# Altium PCB PCB1.PcbDoc (part 4 of 4)
Units mm, origin at the board's own origin, x right, y up, seen from the top; angles counter-clockwise.
Board outline 190.88 x 117.47 mm, 2 copper layers (Top Layer, Bottom Layer); 405 components, 307 nets, 1341 pads, 251 vias.
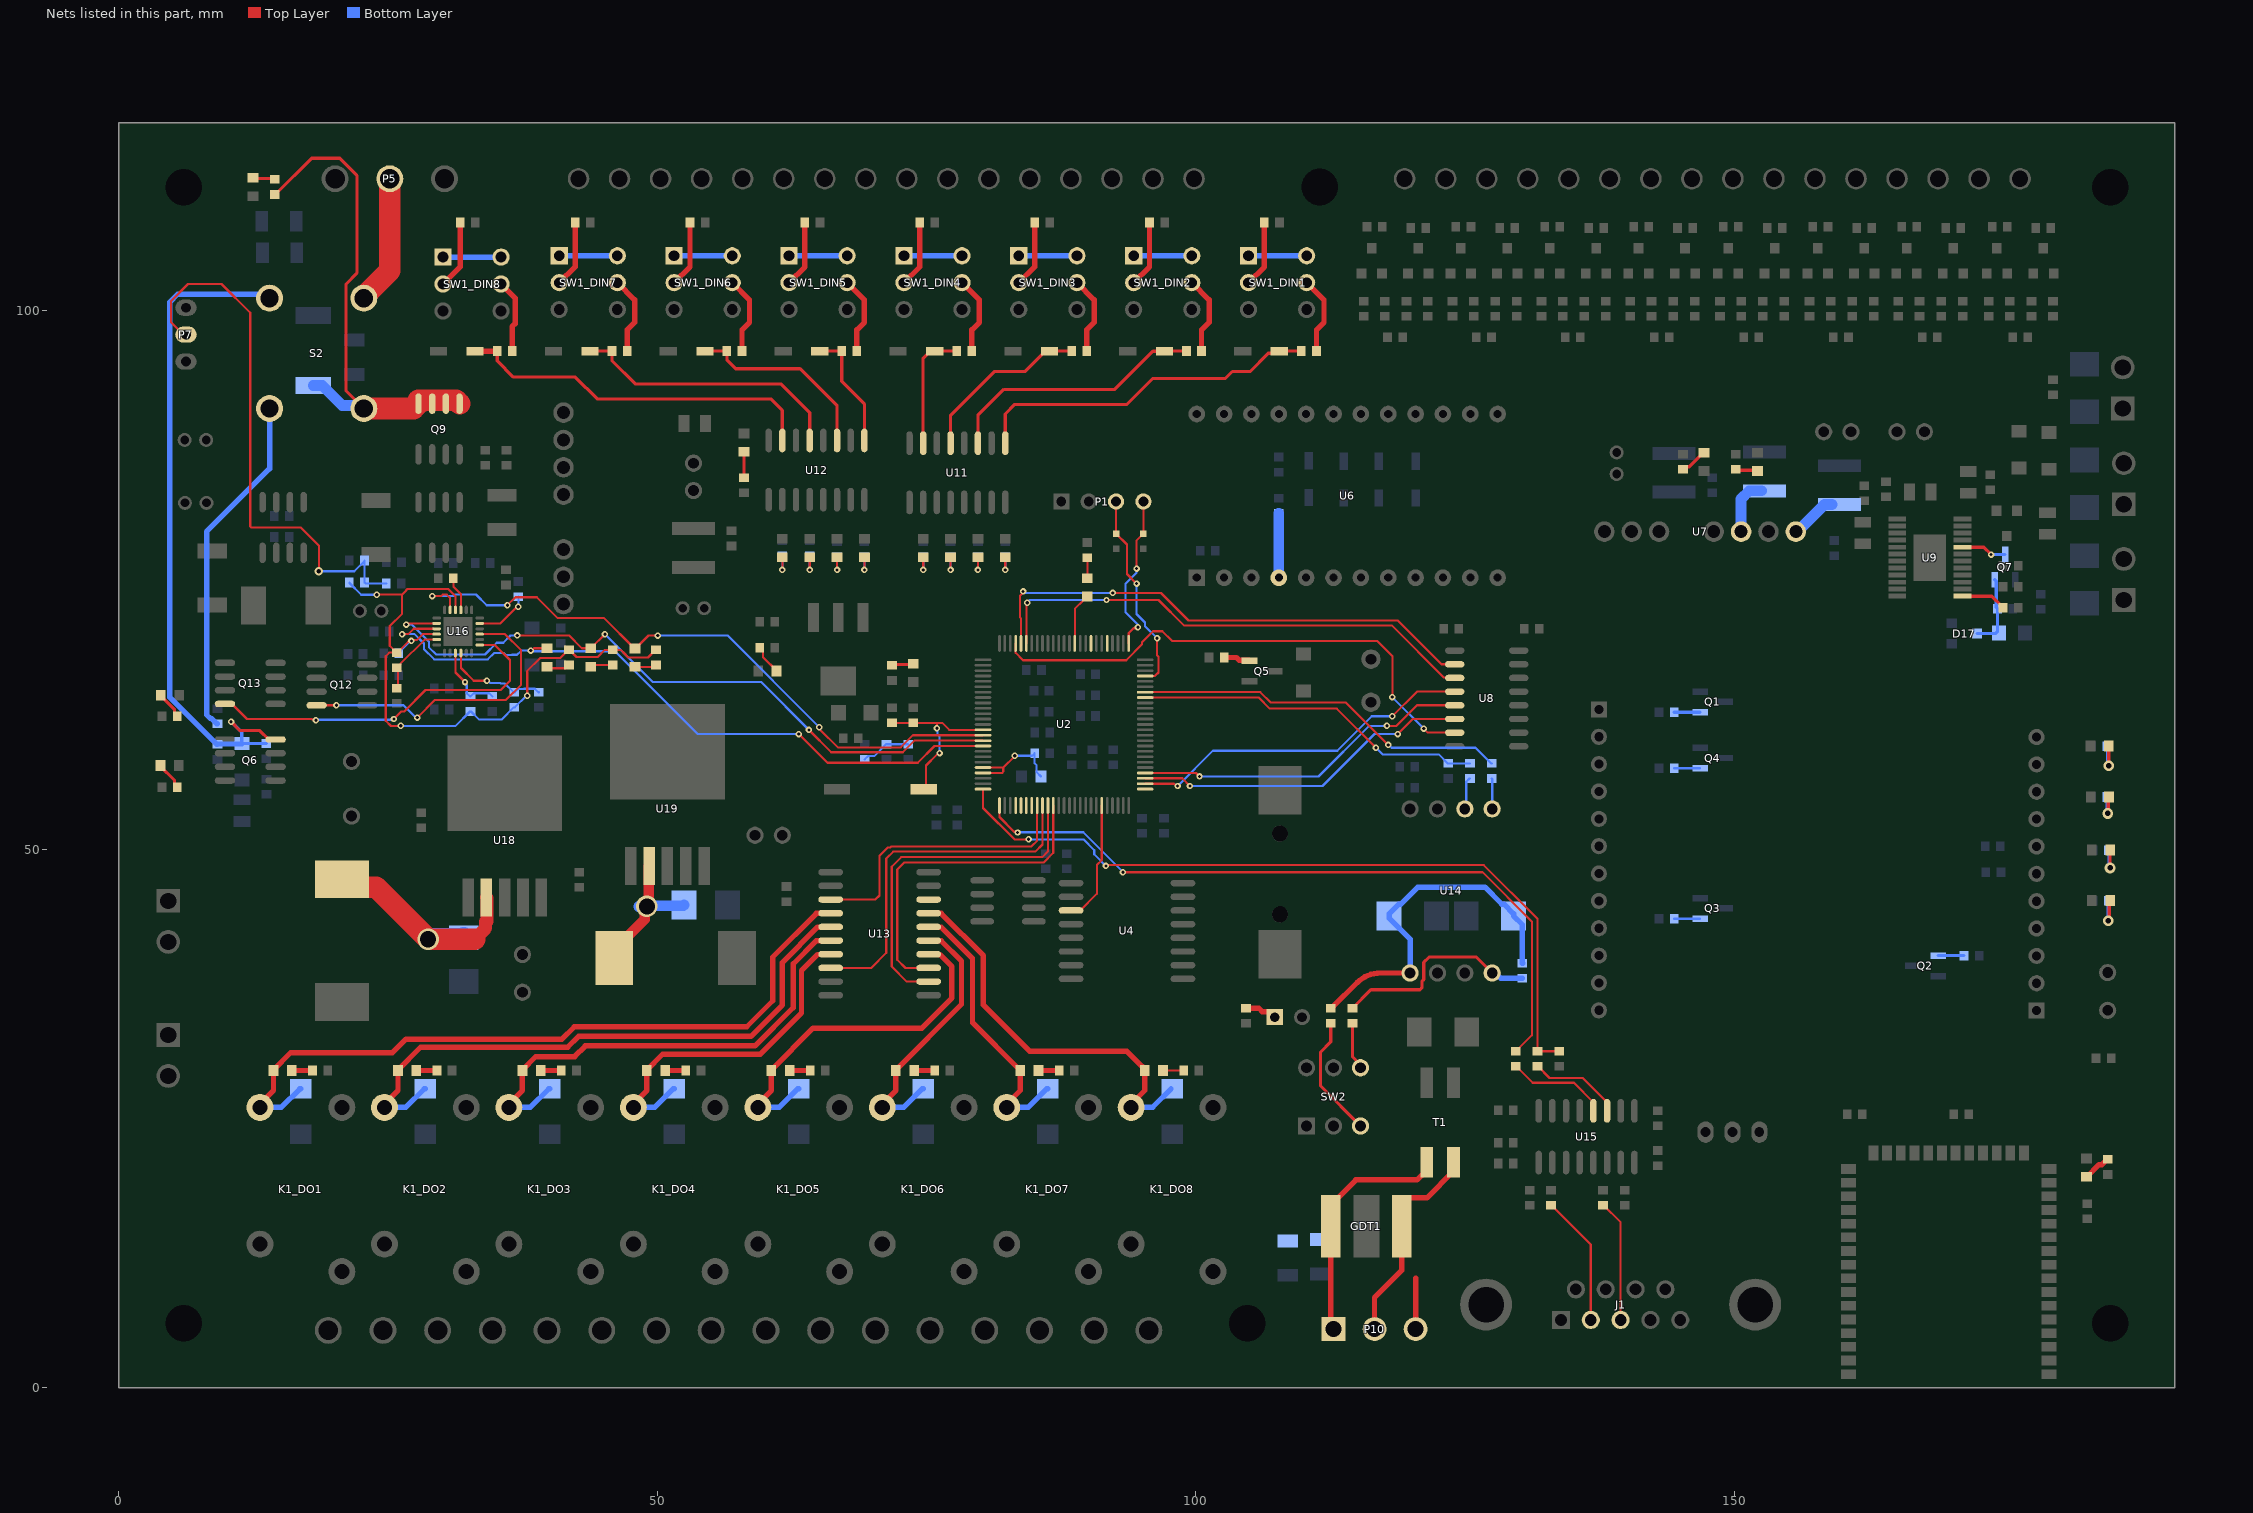
[diagram p4: the nets of this part, all layers, seen from the top]

## Via types
v1: diameter 0.6, hole 0.3, Top Layer to Bottom Layer, 163 vias
v2: diameter 0.8, hole 0.4, Top Layer to Bottom Layer, 40 vias
v3: diameter 1, hole 0.5, Top Layer to Bottom Layer, 30 vias
v4: diameter 1.27, hole 0.711, Top Layer to Bottom Layer, 11 vias
v5: diameter 1.5, hole 1, Top Layer to Bottom Layer, 4 vias
v6: diameter 2, hole 1.5, Top Layer to Bottom Layer, 2 vias
v7: diameter 2, hole 1, Top Layer to Bottom Layer, 1 vias

## Nets (pads, with @x,y where several pads share a name; then routed paths per layer and width w, separated by ;. In a path a pad name is that pad's centre, name@x,y a point inside that pad or via, vN(x,y) a via of type N, cw(c..) or ccw(c..) an arc to the next point about the centre after c; other vN are vias at no path point) (continued)
NetD17_3: D17.3 Q7.E R37.2 R38.1 | length 6.9
  Bottom Layer w0.3: D17.3@172.53,70.038 174.232,70.038 174.433,70.239 R37.2@174.433,72.335 174.308,72.46 174.308,74.9 Q7.E@174.183,75.025
NetD27_2: D27.2 L6.1 U18.2 | length 22.3
  Top Layer w1.2: 33.02,41.656 34.047,42.683 34.047,43.314 ; U18.2@34.112,45.534 34.178,45.469 34.178,43.314
  Top Layer w2: L6.1@20.701,47.229 21.451,46.479 23.879,46.479 v6(28.702,41.656) 33.02,41.656
  Bottom Layer w2: v6(28.702,41.656) 28.762,41.716 31.944,41.716 D27.2@32.004,41.776
NetD28_2: D28.2 L7.1 U19.2 | length 14
  Top Layer w1: L7.1@45.989,39.922 45.989,40.672 48.831,43.514 48.831,44.513 v6(49.022,44.704) ; v6@49.225,44.798 49.191,44.832 49.191,48.42 U19.2@49.225,48.455
  Bottom Layer w1: v6@48.253,44.704 v6(49.022,44.704) 49.085,44.767 52.394,44.767 D28.2@52.458,44.831
NetGDT1_1: GDT1.1 P10.2 T1.2 | length 19.5
  Top Layer w0.5: P10.2@116.586,5.461 116.586,8.382 119.124,10.92 119.124,16.986 119.774,17.636 121.455,17.636 123.932,20.113 T1.2@123.932,20.938
NetGDT1_3: GDT1.3 P10.1 T1.3 | length 22.7
  Top Layer w0.5: P10.1@112.776,5.461 112.524,5.713 112.524,16.986 114.842,19.304 120.523,19.304 120.982,19.763 121.082,19.763 121.432,20.113 T1.3@121.432,20.938
NetJ1_2: J1.2 R62.2 | length 12.2
  Top Layer w0.2: R62.2@132.969,16.953 133.019,16.953 136.664,13.308 J1.2@136.664,6.304
NetJ1_3: J1.3 R64.2 | length 11.4
  Top Layer w0.2: R64.2@137.795,16.953 137.845,16.953 139.434,15.364 J1.3@139.434,6.304
NetL2_2: L2.2 U7.6 | length 5.2
  Bottom Layer w1: U7.6@150.622,79.502 150.622,82.531 151.381,83.29 L2.2@152.527,83.29
NetL3_2: L3.2 U7.8 | length 4.4
  Bottom Layer w1: U7.8@155.702,79.502 155.848,79.502 158.366,82.02 L3.2@159.066,82.02
NetLED1_2: LED1.2 R1.1 | length 3.7
  Top Layer w0.3: v3(184.758,57.758) LED1.2@184.758,59.599
  Bottom Layer w0.3: R1.1@184.596,59.563 184.677,59.482 184.677,57.839 v3(184.758,57.758)
NetLED2_2: LED2.2 R6.1 | length 3.8
  Top Layer w0.3: v3(184.723,43.369) 184.804,43.45 184.804,45.168 LED2.2@184.885,45.249
  Bottom Layer w0.3: v3(184.723,43.369) R6.1@184.723,45.212
NetLED3_2: LED3.2 R7.1 | length 3.4
  Top Layer w0.3: v3(184.885,48.273) LED3.2@184.885,49.947
  Bottom Layer w0.3: R7.1@184.723,49.911 184.804,49.83 184.804,48.354 v3(184.885,48.273)
NetLED4_2: LED4.2 R8.1 | length 3.1
  Top Layer w0.3: v3(184.658,53.34) 184.721,53.404 184.721,54.8 LED4.2@184.785,54.864
  Bottom Layer w0.3: R8.1@184.596,54.864 184.596,53.402 v3(184.658,53.34)
NetLED5_1: LED5.1 U2.86 | length 4.9
  Top Layer w0.2: U2.86@88.757,69.12 88.757,72.325 89.516,73.084 89.516,73.134 89.866,73.484 LED5.1@89.916,73.484
NetLED5_2: LED5.2 R15.1 | length 1.9
  Top Layer w0.2: LED5.2@89.916,75.184 R15.1@89.916,77.089
NetLED6_2: LED6.2 R22.1 | length 2.6
  Top Layer w0.5: LED6.2@182.702,19.597 182.752,19.597 183.871,20.716 184.112,20.716 184.608,21.212 R22.1@184.658,21.212
NetLED7_2: LED7.2 R42.1 | length 2.4
  Top Layer w0.2: v1(82.296,75.946) LED7.2@82.296,77.128
  Bottom Layer w0.2: v1(82.296,75.946) R42.1@82.296,77.151
NetLED8_2: LED8.2 R43.1 | length 2.4
  Top Layer w0.2: v1(69.215,75.946) LED8.2@69.215,77.128
  Bottom Layer w0.2: v1(69.215,75.946) R43.1@69.215,77.151
NetLED9_2: LED9.2 R44.1 | length 2.4
  Top Layer w0.2: v1(79.756,75.946) LED9.2@79.756,77.128
  Bottom Layer w0.2: v1(79.756,75.946) R44.1@79.756,77.151
NetLED10_2: LED10.2 R45.1 | length 2.1
  Top Layer w0.2: v1@66.675,76.2 LED10.2@66.675,77.128
  Bottom Layer w0.2: v1(66.675,75.946) R45.1@66.675,77.151
NetLED11_2: LED11.2 R46.1 | length 2.4
  Top Layer w0.2: v1(77.216,75.946) LED11.2@77.216,77.128
  Bottom Layer w0.2: v1(77.216,75.946) R46.1@77.216,77.151
NetLED12_2: LED12.2 R47.1 | length 2.5
  Top Layer w0.2: v1(64.135,75.946) LED12.2@64.135,77.128
  Bottom Layer w0.2: v1(64.135,75.946) R47.1@64.135,77.278
NetLED13_2: LED13.2 R48.1 | length 2.4
  Top Layer w0.2: v1(74.676,75.946) LED13.2@74.676,77.128
  Bottom Layer w0.2: v1(74.676,75.946) R48.1@74.676,77.151
NetLED14_2: LED14.2 R49.1 | length 2.5
  Top Layer w0.2: v1(61.595,75.946) LED14.2@61.595,77.128
  Bottom Layer w0.2: v1(61.595,75.946) R49.1@61.595,77.278
NetLED15_DO1_2: LED15_DO1.2 R52_DO1.2 | length 1.9
  Top Layer w0.5: LED15_DO1.2@16.047,29.464 R52_DO1.2@17.969,29.464
NetLED15_DO2_2: LED15_DO2.2 R52_DO2.2 | length 1.9
  Top Layer w0.5: LED15_DO2.2@27.604,29.464 R52_DO2.2@29.526,29.464
NetLED15_DO3_2: LED15_DO3.2 R52_DO3.2 | length 1.9
  Top Layer w0.5: LED15_DO3.2@39.161,29.464 R52_DO3.2@41.083,29.464
NetLED15_DO4_2: LED15_DO4.2 R52_DO4.2 | length 1.9
  Top Layer w0.5: LED15_DO4.2@50.718,29.464 R52_DO4.2@52.64,29.464
NetLED15_DO5_2: LED15_DO5.2 R52_DO5.2 | length 1.9
  Top Layer w0.5: LED15_DO5.2@62.275,29.464 R52_DO5.2@64.197,29.464
NetLED15_DO6_2: LED15_DO6.2 R52_DO6.2 | length 1.9
  Top Layer w0.5: LED15_DO6.2@73.832,29.464 R52_DO6.2@75.754,29.464
NetLED15_DO7_2: LED15_DO7.2 R52_DO7.2 | length 1.9
  Top Layer w0.5: LED15_DO7.2@85.389,29.464 R52_DO7.2@87.311,29.464
NetLED15_DO8_2: LED15_DO8.2 R52_DO8.2 | length 1.9
  Top Layer w0.2: LED15_DO8.2@96.946,29.464 R52_DO8.2@98.868,29.464
NetLED16_2: LED16.2 R77.2 | length 2
  Top Layer w0.2: LED16.2@47.916,66.946 49.701,66.946 R77.2@49.872,67.118
NetLED17_2: LED17.2 R78.2 | length 2.2
  Top Layer w0.2: LED17.2@39.751,66.968 39.9,66.819 41.484,66.819 R78.2@41.783,67.118
NetLED18_2: LED18.2 R81.2 | length 2.1
  Top Layer w0.2: LED18.2@43.815,66.968 43.965,67.118 R81.2@45.847,67.118
NetLED19_2: LED19.2 R29.1 | length 2.6
  Top Layer w0.3: R29.1@145.217,85.279 145.467,85.529 145.824,85.529 147.124,86.829 LED19.2@147.174,86.829
NetLED20_1: LED20.1 R30.1 | length 2.1
  Top Layer w0.3: R30.1@150.114,85.279 150.189,85.204 152.071,85.204 LED20.1@152.146,85.129
NetLED21_2: LED21.2 R41.1 | length 2.4
  Top Layer w0.3: R41.1@58.039,84.52 LED21.2@58.039,86.907
NetLED22_2: LED22.2 R28.1 | length 2.8
  Top Layer w0.2: R28.1@59.498,68.707 59.798,68.407 59.798,67.848 61.048,66.598 LED22.2@61.048,66.548
NetLED23_2: LED23.2 R40.1 | length 2
  Top Layer w0.3: R40.1@71.787,67.082 71.862,67.157 73.674,67.157 LED23.2@73.749,67.232
NetLED24_2: LED24.2 R88.1 | length 2.7
  Top Layer w0.3: LED24.2@3.849,57.785 3.849,57.735 5.149,56.435 5.149,56.003 R88.1@5.399,55.753
NetLED25_2: LED25.2 R89.1 | length 2.1
  Top Layer w0.3: LED25.2@12.446,112.356 12.521,112.281 14.403,112.281 R89.1@14.478,112.206
NetLED26_2: LED26.2 R5.1 | length 2.6
  Top Layer w0.3: LED26.2@3.888,64.313 3.888,64.263 5.149,63.002 5.149,62.607 R5.1@5.399,62.357
NetP2_1: P2.1 R54.1 | length 3.1
  Top Layer w0.5: R54.1@104.648,35.244 105.848,35.244 106.175,34.917 106.815,34.917 P2.1@107.315,34.417
  Bottom Layer w0.5: P2.1@107.25,34.352 P2.1@107.315,34.417
NetP7_2: P7.2 R83.2 R86.1 R87.1 | length 51.1
  Top Layer w0.2: P7.2@6.223,97.79 5.973,97.79 4.826,98.937 4.826,100.9 6.415,102.489 9.525,102.489 12.192,99.822 12.192,80 12.309,79.883 16.891,79.883 18.557,78.217 v2(18.557,75.823)
  Bottom Layer w0.2: v2(18.557,75.823) 21.859,75.823 22.798,76.761 R87.1@22.798,76.811 R83.2@22.798,74.778 22.9,74.676 R86.1@24.827,74.676
NetQ1_B: Q1.B R3.2 | length 2.4
  Bottom Layer w0.3: R3.2@144.399,62.738 Q1.B@146.812,62.738
NetQ2_B: Q2.B R9.2 | length 2.4
  Bottom Layer w0.3: Q2.B@168.91,40.132 R9.2@171.32,40.132
NetQ3_B: Q3.B R10.2 | length 2.4
  Bottom Layer w0.2: R10.2@144.399,43.561 Q3.B@146.812,43.561
NetQ4_B: Q4.B R11.2 | length 2.4
  Bottom Layer w0.2: R11.2@144.399,57.531 Q4.B@146.812,57.531
NetQ5_B: Q5.B R17.1 | length 2.5
  Top Layer w0.5: R17.1@102.618,67.818 103.768,67.818 104.038,67.548 104.926,67.548 Q5.B@104.976,67.498
NetQ7_C: Q7.C U9.20 | length 4.2
  Top Layer w0.3: U9.20@171.171,78.054 173.152,78.054 v1(173.831,77.375)
  Bottom Layer w0.3: v1(173.831,77.375) Q7.C@175.133,77.375
NetQ12_4: Q12.4 U16.21 | length 28.1
  Top Layer w0.2: Q12.4@18.351,63.373 v1(20.193,63.373) ; v1(27.686,62.23) 29.337,63.881 35.941,63.881 37.338,65.278 37.338,68.489 35.846,69.981 U16.21@33.796,69.981
  Bottom Layer w0.2: v1(20.193,63.373) 26.416,63.373 27.398,62.391 27.417,62.391 27.578,62.23 v1(27.686,62.23)
NetQ13_4: Q13.4 U16.19 | length 33.6
  Top Layer w0.2: Q13.4@9.842,63.5 10.492,63.5 11.889,62.103 17.907,62.103 17.957,62.053 18.211,62.053 v1(18.288,61.976) ; v1(25.527,62.103) 26.224,62.8 26.478,62.8 28.467,64.789 35.445,64.789 36.312,65.656 36.312,67.574 34.905,68.981 U16.19@33.796,68.981
  Bottom Layer w0.2: v1(18.288,61.976) 18.351,62.039 25.463,62.039 v1(25.527,62.103)
NetR39_1: R39.1 U9.13 | length 4.2
  Top Layer w0.3: U9.13@171.171,73.508 173.91,73.508 174.941,72.476 R39.1@174.941,72.426
NetR50_DIN1_1: R50_DIN1.1 SW1_DIN1.5 | length 7.3
  Top Layer w0.5: SW1_DIN1.5@110.285,102.616 111.887,101.014 111.887,98.933 111.19,98.236 R50_DIN1.1@111.19,96.266
NetR50_DIN2_1: R50_DIN2.1 SW1_DIN2.5 | length 7.3
  Top Layer w0.5: SW1_DIN2.5@99.617,102.616 101.219,101.014 101.219,98.933 100.522,98.236 R50_DIN2.1@100.522,96.266
NetR50_DIN3_1: R50_DIN3.1 SW1_DIN3.5 | length 7.3
  Top Layer w0.5: SW1_DIN3.5@88.949,102.616 90.551,101.014 90.551,98.933 89.854,98.236 R50_DIN3.1@89.854,96.266
NetR50_DIN4_1: R50_DIN4.1 SW1_DIN4.5 | length 7.3
  Top Layer w0.5: SW1_DIN4.5@78.281,102.616 79.883,101.014 79.883,98.933 79.186,98.236 R50_DIN4.1@79.186,96.266
NetR50_DIN5_1: R50_DIN5.1 SW1_DIN5.5 | length 7.3
  Top Layer w0.5: SW1_DIN5.5@67.613,102.616 69.215,101.014 69.215,98.933 68.518,98.236 R50_DIN5.1@68.518,96.266
NetR50_DIN6_1: R50_DIN6.1 SW1_DIN6.5 | length 7.3
  Top Layer w0.5: SW1_DIN6.5@56.945,102.616 58.547,101.014 58.547,98.933 57.85,98.236 R50_DIN6.1@57.85,96.266
NetR50_DIN7_1: R50_DIN7.1 SW1_DIN7.5 | length 7.3
  Top Layer w0.5: SW1_DIN7.5@46.277,102.616 47.879,101.014 47.879,98.933 47.182,98.236 R50_DIN7.1@47.182,96.266
NetR50_DIN8_1: R50_DIN8.1 SW1_DIN8.5 | length 6.9
  Top Layer w0.5: SW1_DIN8.5@35.482,102.489 36.786,101.185 36.786,98.813 36.514,98.541 R50_DIN8.1@36.514,96.266
NetR51_DIN1_1: R51_DIN1.1 SW1_DIN1.2 | length 6.2
  Top Layer w0.5: SW1_DIN1.2@104.885,102.616 106.361,104.092 R51_DIN1.1@106.361,108.204
NetR51_DIN2_1: R51_DIN2.1 SW1_DIN2.2 | length 6.2
  Top Layer w0.5: SW1_DIN2.2@94.217,102.616 95.693,104.092 R51_DIN2.1@95.693,108.204
NetR51_DIN3_1: R51_DIN3.1 SW1_DIN3.2 | length 6.2
  Top Layer w0.5: SW1_DIN3.2@83.549,102.616 85.025,104.092 R51_DIN3.1@85.025,108.204
NetR51_DIN4_1: R51_DIN4.1 SW1_DIN4.2 | length 6.2
  Top Layer w0.5: SW1_DIN4.2@72.881,102.616 74.357,104.092 R51_DIN4.1@74.357,108.204
NetR51_DIN5_1: R51_DIN5.1 SW1_DIN5.2 | length 6.2
  Top Layer w0.5: SW1_DIN5.2@62.213,102.616 63.689,104.092 R51_DIN5.1@63.689,108.204
NetR51_DIN6_1: R51_DIN6.1 SW1_DIN6.2 | length 6.2
  Top Layer w0.5: SW1_DIN6.2@51.545,102.616 53.021,104.092 R51_DIN6.1@53.021,108.204
NetR51_DIN7_1: R51_DIN7.1 SW1_DIN7.2 | length 6.2
  Top Layer w0.5: SW1_DIN7.2@40.877,102.616 42.353,104.092 R51_DIN7.1@42.353,108.204
NetR51_DIN8_1: R51_DIN8.1 SW1_DIN8.2 | length 6.4
  Top Layer w0.5: SW1_DIN8.2@30.082,102.489 31.685,104.092 31.685,108.004 R51_DIN8.1@31.685,108.204
NetR53_1: R53.1 SW2.3 | length 11.5
  Top Layer w0.3: R53.1@112.522,33.844 112.522,32.131 111.572,31.181 111.572,28.022 SW2.3@115.276,24.318
NetR55_1: R55.1 SW2.6 | length 4.4
  Top Layer w0.3: R55.1@114.535,33.844 114.535,30.745 115.276,30.004 SW2.6@115.276,29.718
NetR57_2: R57.2 U14.3 | length 3
  Bottom Layer w0.2: U14.3@124.968,53.757 125.101,53.89 125.101,56.277 125.401,56.577 R57.2@125.451,56.577
NetR58_2: R58.2 U14.4 | length 2.8
  Bottom Layer w0.2: R58.2@127.464,56.577 127.508,56.533 U14.4@127.508,53.757
NetR61_2: R61.2 U15.11 | length 8.6
  Top Layer w0.2: R61.2@131.713,29.845 131.762,29.845 132.832,28.775 135.919,28.775 138.176,26.518 U15.11@138.176,25.718
NetR63_2: R63.2 U15.12 | length 9.4
  Top Layer w0.2: R63.2@129.699,29.845 129.749,29.845 131.273,28.321 135.103,28.321 136.906,26.518 U15.12@136.906,25.718
NetR69_2: R69.2 U16.23 | length 4.9
  Top Layer w0.2: U16.23@33.796,70.981 35.421,70.981 36.796,72.356 36.815,72.356 36.976,72.517 v1(37.084,72.517)
  Bottom Layer w0.2: v1(37.084,72.517) R69.2@37.084,73.468
NetR70_1: R70.1 U16.3 | length 2.9
  Top Layer w0.2: R70.1@31.053,75.184 31.053,74.402 31.746,73.709 U16.3@31.746,72.531
NetR71_2: R71.2 R74.1 U16.16 | length 9.5
  Top Layer w0.2: U16.16@31.746,67.931 31.752,67.925 31.752,66.836 32.929,65.659 v1(34.163,65.659)
  Bottom Layer w0.2: v1(34.163,65.659) 34.271,65.659 34.471,65.459 35.405,65.459 35.459,65.405 35.829,65.405 36.653,64.581 R71.2@36.703,64.581 ; R71.2@36.743,64.581 37.043,64.881 37.598,64.881 37.633,64.916 38.604,64.916 38.939,64.581 R74.1@38.989,64.581
NetR72_2: R72.2 R75.1 U16.15 | length 6.6
  Top Layer w0.2: U16.15@31.246,67.931 31.246,66.417 v1(32.131,65.532)
  Bottom Layer w0.2: v1(32.131,65.532) 32.131,65.424 32.289,65.266 32.289,64.5 32.589,64.2 R72.2@32.639,64.2 ; R72.2@32.653,64.2 32.952,64.5 34.371,64.5 R75.1@34.671,64.2
NetR73_2: R73.2 R76.1 U16.11 | length 6.6
  Top Layer w0.2: R76.1@25.781,64.954 25.908,65.081 25.908,66.737 R73.2@25.781,66.864 25.831,66.864 26.131,67.164 26.131,67.226 28.38,69.475 29.19,69.475 U16.11@29.196,69.481
NetR80_1: R80.1 R82.2 R85.2 | length 4.6
  Bottom Layer w0.2: R80.1@69.252,58.355 69.552,58.655 70.116,58.655 71.216,59.755 R85.2@71.266,59.755 R82.2@73.279,59.755
NetSW1_DIN1_1: SW1_DIN1.1 SW1_DIN1.4 | length 5.4
  Bottom Layer w0.5: SW1_DIN1.1@104.885,105.116 SW1_DIN1.4@110.285,105.116
NetSW1_DIN2_1: SW1_DIN2.1 SW1_DIN2.4 | length 5.4
  Bottom Layer w0.5: SW1_DIN2.1@94.217,105.116 SW1_DIN2.4@99.617,105.116
NetSW1_DIN3_1: SW1_DIN3.1 SW1_DIN3.4 | length 5.4
  Bottom Layer w0.5: SW1_DIN3.1@83.549,105.116 SW1_DIN3.4@88.949,105.116
NetSW1_DIN4_1: SW1_DIN4.1 SW1_DIN4.4 | length 5.4
  Bottom Layer w0.5: SW1_DIN4.1@72.881,105.116 SW1_DIN4.4@78.281,105.116
NetSW1_DIN5_1: SW1_DIN5.1 SW1_DIN5.4 | length 5.4
  Bottom Layer w0.5: SW1_DIN5.1@62.213,105.116 SW1_DIN5.4@67.613,105.116
NetSW1_DIN6_1: SW1_DIN6.1 SW1_DIN6.4 | length 5.4
  Bottom Layer w0.5: SW1_DIN6.1@51.545,105.116 SW1_DIN6.4@56.945,105.116
NetSW1_DIN7_1: SW1_DIN7.1 SW1_DIN7.4 | length 5.4
  Bottom Layer w0.5: SW1_DIN7.1@40.877,105.116 SW1_DIN7.4@46.277,105.116
NetSW1_DIN8_1: SW1_DIN8.1 SW1_DIN8.4 | length 5.4
  Bottom Layer w0.5: SW1_DIN8.1@30.082,104.989 SW1_DIN8.4@35.482,104.989
NetU2_95: U2.95 U8.3 | length 46.6
  Top Layer w0.2: U2.95@84.257,69.12 84.267,69.13 84.267,72.837 v1(84.328,72.898) ; v1(91.694,73.152) 96.52,73.152 98.879,70.793 118.183,70.793 123.022,65.954 123.987,65.954 U8.3@124.028,65.913
  Bottom Layer w0.2: v1(84.328,72.898) 84.582,73.152 v1(91.694,73.152)
NetU2_96: U2.96 U8.2 | length 47.9
  Top Layer w0.2: U2.96@83.757,69.12 83.757,71.435 83.674,71.518 83.674,73.571 83.947,73.844 v1(83.947,73.952) ; v1(92.285,73.806) 96.755,73.806 99.314,71.247 118.745,71.247 122.809,67.183 U8.2@124.028,67.183
  Bottom Layer w0.2: v1(83.947,73.952) 84.093,73.806 v1(92.285,73.806)
NetU2_97: U2.97 U8.7 | length 49.9
  Top Layer w0.2: U2.97@83.257,69.12 83.257,68.254 83.947,67.564 93.528,67.564 94.984,69.019 94.984,69.203 95.631,69.85 96.031,70.25 96.882,70.25 97.79,69.342 116.84,69.342 118.237,67.945 v1(118.237,64.135) ; v1(121.158,61.214) 121.539,60.833 U8.7@124.028,60.833 U8.7@124.627,60.833
  Bottom Layer w0.2: v1(118.237,64.135) v1(121.158,61.214)
NRST: C4.2 R19.2 S1.2 U2.14 | length 15.6
  Top Layer w0.2: R19.2@71.787,61.745 C4.2@73.754,61.745 76.447,61.745 77.097,61.095 U2.14@80.232,61.095 ; S1.2@74.743,55.581 74.93,55.768 74.93,57.785 75.919,58.774 75.924,58.774 76.092,58.941 v1(76.2,58.941) ; v1(75.946,61.249) 75.946,61.722
  Bottom Layer w0.2: v1(75.946,61.249) 76.003,61.192 76.003,60.649 76.2,60.452 v1(76.2,58.941)
OP_P1: D20_DIN1.2 R50_DIN1.2 U11.1 | length 32.6
  Top Layer w0.3: U11.1@82.296,87.713 82.296,90.424 83.185,91.313 93.599,91.313 96.012,93.726 102.743,93.726 103.389,94.372 105.04,94.372 106.721,96.053 107.532,96.053 D20_DIN1.2@107.745,96.266 R50_DIN1.2@109.79,96.266
OP_P2: D20_DIN2.2 R50_DIN2.2 U11.3 | length 24.4
  Top Layer w0.3: U11.3@79.756,87.713 79.756,90.297 82.169,92.71 92.456,92.71 96.003,96.257 97.068,96.257 D20_DIN2.2@97.077,96.266 R50_DIN2.2@99.122,96.266
OP_P3: D20_DIN3.2 R50_DIN3.2 U11.5 | length 16.3
  Top Layer w0.3: U11.5@77.216,87.713 77.216,90.297 81.28,94.361 84.104,94.361 86.009,96.266 D20_DIN3.2@86.409,96.266 R50_DIN3.2@88.454,96.266
OP_P4: D20_DIN4.2 R50_DIN4.2 U11.7 | length 11.3
  Top Layer w0.3: U11.7@74.676,87.713 74.667,87.722 74.667,95.592 75.341,96.266 R50_DIN4.2@77.786,96.266
OP_P5: D20_DIN5.2 R50_DIN5.2 U12.1 | length 11.2
  Top Layer w0.3: D20_DIN5.2@65.073,96.266 R50_DIN5.2@67.118,96.266 67.118,93.455 69.215,91.358 U12.1@69.215,87.967
OP_P6: D20_DIN6.2 R50_DIN6.2 U12.3 | length 18.1
  Top Layer w0.3: D20_DIN6.2@54.405,96.266 R50_DIN6.2@56.45,96.266 56.45,95.442 57.277,94.615 63.246,94.615 66.675,91.186 U12.3@66.675,87.967
OP_P7: D20_DIN7.2 R50_DIN7.2 U12.5 | length 25.9
  Top Layer w0.3: D20_DIN7.2@43.737,96.266 R50_DIN7.2@45.782,96.266 45.782,95.366 47.93,93.218 61.468,93.218 64.135,90.551 U12.5@64.135,87.967
OP_P8: D20_DIN8.2 R50_DIN8.2 U12.7 | length 34.1
  Top Layer w0.3: R50_DIN8.2@35.114,96.266 35.114,95.366 36.627,93.853 42.367,93.853 44.399,91.821 60.525,91.821 61.595,90.752 U12.7@61.595,87.967
  Top Layer w0.5: D20_DIN8.2@33.069,96.266 R50_DIN8.2@35.114,96.266
PG: LED18.1 U2.16 U16.8 | length 64.4
  Top Layer w0.2: v1(26.67,70.866) 26.785,70.981 U16.8@29.196,70.981 ; v1(36.975,69.868) 41.784,69.868 42.983,68.668 LED18.1@43.815,68.668 v1(45.124,69.977) ; v1(64.068,61.087) 66.138,59.017 72.78,59.017 73.858,60.095 U2.16@80.232,60.095
  Bottom Layer w0.2: v1(26.67,70.866) 27.213,70.866 28.775,69.304 28.775,68.78 29.464,68.091 33.991,68.091 35.084,69.183 35.687,69.183 36.354,69.85 36.957,69.85 v1(36.975,69.868) ; v1(45.124,69.977) 49.569,65.532 59.623,65.532 v1(64.068,61.087)
Relay_CTR1: D21_DO1.1 K1_DO1.1 LED15_DO1.1 U13.4 | length 68.7
  Top Layer w0.5: K1_DO1.1@13.091,26.035 13.091,26.352 14.347,27.608 LED15_DO1.1@14.347,29.464 14.347,29.514 15.948,31.115 25.4,31.115 26.662,32.377 41.14,32.377 42.291,33.528 58.293,33.528 60.706,35.941 60.706,40.005 64.76,44.059 66.074,44.059 U13.4@66.084,44.069
  Bottom Layer w0.5: K1_DO1.1@13.091,26.035 13.11,26.054 15.091,26.054 16.791,27.754 D21_DO1.1@16.891,27.754
Relay_CTR2: D21_DO2.1 K1_DO2.1 LED15_DO2.1 U13.5 | length 56.5
  Top Layer w0.5: K1_DO2.1@24.648,26.035 24.648,26.352 25.904,27.608 LED15_DO2.1@25.904,29.464 25.904,29.514 28.013,31.623 41.656,31.623 42.672,32.639 58.674,32.639 61.595,35.56 61.595,39.497 64.878,42.78 66.065,42.78 U13.5@66.084,42.799
  Bottom Layer w0.5: K1_DO2.1@24.648,26.035 24.667,26.054 26.648,26.054 28.348,27.754 D21_DO2.1@28.448,27.754
Relay_CTR3: D21_DO3.1 K1_DO3.1 LED15_DO3.1 U13.6 | length 44.5
  Top Layer w0.5: K1_DO3.1@36.205,26.035 36.205,26.352 37.461,27.608 LED15_DO3.1@37.461,29.464 37.461,29.514 38.698,30.752 42.309,30.752 43.307,31.75 59.055,31.75 62.611,35.306 62.611,39.37 64.76,41.519 66.074,41.519 U13.6@66.084,41.529
  Bottom Layer w0.5: K1_DO3.1@36.205,26.035 36.224,26.054 38.205,26.054 39.905,27.754 D21_DO3.1@40.005,27.754
Relay_CTR4: D21_DO4.1 K1_DO4.1 LED15_DO4.1 U13.7 | length 32.3
  Top Layer w0.5: K1_DO4.1@47.762,26.035 47.762,26.352 49.018,27.608 LED15_DO4.1@49.018,29.464 49.018,29.514 50.492,30.988 59.563,30.988 63.373,34.798 63.373,38.735 64.878,40.24 66.065,40.24 U13.7@66.084,40.259
  Bottom Layer w0.5: K1_DO4.1@47.762,26.035 47.781,26.054 49.762,26.054 51.462,27.754 D21_DO4.1@51.562,27.754
Relay_CTR5: D21_DO5.1 K1_DO5.1 LED15_DO5.1 U13.14 | length 33.6
  Top Layer w0.5: K1_DO5.1@59.319,26.035 59.319,26.352 60.575,27.608 LED15_DO5.1@60.575,29.464 60.575,29.514 64.462,33.401 74.549,33.401 77.343,36.195 77.343,39.116 76.219,40.24 75.203,40.24 U13.14@75.184,40.259
  Bottom Layer w0.5: K1_DO5.1@59.319,26.035 59.338,26.054 61.319,26.054 63.019,27.754 D21_DO5.1@63.119,27.754
Relay_CTR6: D21_DO6.1 K1_DO6.1 LED15_DO6.1 U13.15 | length 25
  Top Layer w0.5: K1_DO6.1@70.876,26.035 70.876,26.352 72.132,27.608 LED15_DO6.1@72.132,29.464 72.132,29.514 78.232,35.614 78.232,39.624 76.346,41.51 75.203,41.51 U13.15@75.184,41.529
  Bottom Layer w0.5: K1_DO6.1@70.876,26.035 70.895,26.054 72.876,26.054 74.576,27.754 D21_DO6.1@74.676,27.754
Relay_CTR7: D21_DO7.1 K1_DO7.1 LED15_DO7.1 U13.16 | length 26
  Top Layer w0.5: U13.16@75.184,42.799 75.203,42.78 76.346,42.78 79.248,39.878 79.248,33.905 LED15_DO7.1@83.689,29.464 ; K1_DO7.1@82.433,26.035 82.433,26.352 83.689,27.608 LED15_DO7.1@83.689,29.464 ; LED15_DO7.1@83.689,29.514 LED15_DO7.1@83.689,29.464
  Bottom Layer w0.5: K1_DO7.1@82.433,26.035 82.452,26.054 84.433,26.054 86.133,27.754 D21_DO7.1@86.233,27.754
Relay_CTR8: D21_DO8.1 K1_DO8.1 LED15_DO8.1 U13.17 | length 37.2
  Top Layer w0.5: U13.17@75.184,44.069 75.203,44.05 76.346,44.05 80.264,40.132 80.264,35.56 84.582,31.242 93.599,31.242 95.046,29.795 95.046,29.664 LED15_DO8.1@95.246,29.464 95.246,27.608 93.99,26.352 K1_DO8.1@93.99,26.035
  Bottom Layer w0.5: K1_DO8.1@94.009,26.054 95.99,26.054 D21_DO8.1@97.69,27.754
RS485_EXT_GND: C51.1 C52.2 D23.2 D25.1 P10.3 R53.2 R59.1 U14.10 | length 38.2
  Top Layer w0.5: R53.2@112.522,35.244 112.672,35.394 112.737,35.394 114.955,37.612 cw(c117.138,35.433) 117.138,38.517 U14.10@119.888,38.517 ; P10.3@120.396,5.461 120.396,10.16
  Bottom Layer w0.5: U14.10@119.888,38.517 119.888,41.665 117.938,43.615 D25.1@117.938,43.815 117.938,44.015 118.838,44.915 119.038,44.915 120.605,46.482 126.828,46.482 128.395,44.915 128.595,44.915 129.495,44.015 D23.2@129.495,43.815 130.302,43.008 C51.1@130.302,39.433 C51.1@130.352,39.433
RS485_EXT_VCC: C51.2 R55.2 U14.7 | length 19.8
  Top Layer w0.3: R55.2@114.535,35.244 116.248,36.957 120.806,36.957 120.982,37.133 120.982,37.733 121.158,37.91 121.158,39.497 121.666,40.005 126.02,40.005 U14.7@127.508,38.517
  Bottom Layer w0.5: U14.7@127.508,38.517 127.806,38.517 128.29,38.033 C51.2@130.302,38.033
RTC_INT: U2.45 U4.3 | length 11.4
  Top Layer w0.2: U4.3@88.405,44.323 89.254,44.323 90.805,45.874 90.805,48.55 91.257,49.002 U2.45@91.257,54.07
SER_OUT: U13.18
SPI1_MISO: U2.31
SPI1_MOSI: U2.32
SPI1_NSS: U2.29
SPI1_SCK: U2.30
SPI2_MISO: U2.53 U8.6 | length 31.6
  Top Layer w0.2: U2.53@95.282,56.595 98.726,56.595 v1(99.441,55.88) ; v1(118.745,60.706) 120.142,62.103 U8.6@124.028,62.103
  Bottom Layer w0.2: v1(99.441,55.88) 111.76,55.88 116.586,60.706 v1(118.745,60.706)
SPI2_MOSI: U2.54 U8.5 | length 31.6
  Top Layer w0.2: U2.54@95.282,57.095 100.004,57.095 v1(100.33,56.769) ; v1(117.729,61.468) 118.618,61.468 120.523,63.373 U8.5@124.028,63.373
  Bottom Layer w0.2: v1(100.33,56.769) 111.386,56.769 116.085,61.468 v1(117.729,61.468)
SPI2_NSS: U2.51
SPI2_SCK: U2.52 U8.4 | length 32.5
  Top Layer w0.2: U2.52@95.282,56.095 97.975,56.095 98.19,55.88 v1(98.298,55.88) ; v1(118.237,62.357) 120.523,64.643 U8.4@124.028,64.643
  Bottom Layer w0.2: v1(98.298,55.88) 101.575,59.157 113.132,59.157 116.332,62.357 v1(118.237,62.357)
STAT1: LED16.1 U2.15 U16.5 | length 61.9
  Top Layer w0.2: v1(29.083,73.514) 29.919,73.514 30.052,73.647 30.44,73.647 30.74,73.347 30.74,72.537 U16.5@30.746,72.531 ; v1(36.068,72.663) 36.811,73.406 38.796,73.406 40.735,71.467 45.045,71.467 47.866,68.646 LED16.1@47.916,68.646 47.966,68.646 49.17,69.85 v1(50.038,69.85) ; v1(65.024,61.341) 65.101,61.264 65.101,61.119 66.749,59.471 72.592,59.471 73.716,60.595 U2.15@80.232,60.595
  Bottom Layer w0.2: v1(29.083,73.514) 31.096,73.514 31.242,73.66 33.147,73.66 34.144,72.663 v1(36.068,72.663) ; v1(50.038,69.85) 56.515,69.85 v1(65.024,61.341)
STAT2: LED17.1 U2.17 U16.9 | length 65.4
  Top Layer w0.2: v1(26.289,69.977) 26.318,70.006 26.893,70.006 27.368,70.481 U16.9@29.196,70.481 ; v1(38.227,68.453) 38.335,68.453 38.55,68.668 LED17.1@39.751,68.668 ; v1(63.119,60.706) 65.786,58.039 74.168,58.039 75.724,59.595 U2.17@80.232,59.595
  Bottom Layer w0.2: v1(26.289,69.977) 26.318,70.006 27.431,70.006 28.321,69.116 28.321,68.592 29.276,67.637 34.236,67.637 34.817,68.218 35.759,68.218 35.924,68.053 36.466,68.053 36.485,68.072 36.964,68.072 37.345,68.453 v1(38.227,68.453) 38.284,68.396 46.063,68.396 53.753,60.706 v1(63.119,60.706)
SWA: D10.2 Q6.4 R90.2 R91.2 S2.3 | length 64.5
  Top Layer w0.3: v1(10.414,61.849) 11.239,61.023 13.066,61.023 13.892,60.198 Q6.4@14.542,60.198
  Bottom Layer w0.3: v1(10.414,61.849) 11.407,60.856 D10.2@11.407,59.827 ; D10.2@11.407,59.785 11.445,59.823 R91.2@13.666,59.823
  Bottom Layer w0.5: D10.2@11.407,59.785 9.182,59.785 R90.2@9.144,59.747 9.094,59.747 4.704,64.137 4.704,100.794 5.454,101.544 13.621,101.544 S2.3@13.983,101.182
SWB: R92.1 S2.4 | length 32.2
  Bottom Layer w0.5: R92.1@9.144,61.657 9.094,61.657 8.598,62.153 8.485,62.153 8.14,62.498 8.14,79.514 13.983,85.357 S2.4@13.983,90.932
SWCLK: D2.2 P1.4 U2.76 | length 14.9
  Top Layer w0.2: U2.76@93.757,69.12 93.757,70.088 94.204,70.535 94.538,70.535 v1(94.615,70.612) ; v1(94.488,76.073) 94.469,76.092 94.469,78.659 D2.2@95.123,79.313 P1.4@95.123,82.296
  Bottom Layer w0.2: v1(94.488,76.073) 94.488,75.692 93.453,74.657 93.453,72.028 94.615,70.866 v1(94.615,70.612)
SWDIO: D1.2 P1.3 U2.72 | length 18.9
  Top Layer w0.2: P1.3@92.583,82.296 D1.2@92.583,79.313 93.597,78.299 93.597,75.567 v1(94.488,74.676) ; U2.72@95.282,66.095 95.292,66.105 96.204,66.105 96.52,66.421 96.52,67.891 96.393,68.018 v1(96.393,69.596)
  Bottom Layer w0.2: v1(94.488,74.676) 94.488,71.846 95.269,71.065 95.269,70.72 v1(96.393,69.596)
TPIC_DATA: U2.33 U13.3 | length 26.9
  Top Layer w0.2: U13.3@66.084,45.339 70.231,45.339 70.612,45.72 70.612,49.403 71.374,50.165 71.621,50.165 71.729,50.273 84.726,50.273 85.257,50.804 U2.33@85.257,54.07
TPIC_RCK: U2.35 U13.12 | length 32.6
  Top Layer w0.2: U13.12@75.184,37.719 73.152,37.719 71.755,39.116 71.755,48.387 72.644,49.276 85.718,49.276 86.257,49.815 U2.35@86.257,54.07
TPIC_SRCK: U2.36 U13.13 | length 31.1
  Top Layer w0.2: U13.13@75.184,38.989 73.025,38.989 72.263,39.751 72.263,48.133 72.898,48.768 85.852,48.768 86.757,49.673 U2.36@86.757,54.07
TPIC_SRCLR: U2.34 U13.8 | length 33.2
  Top Layer w0.2: U13.8@66.084,38.989 69.85,38.989 71.247,40.386 71.247,49.149 71.882,49.784 85.09,49.784 85.747,50.441 85.747,54.06 U2.34@85.757,54.07
UART5_RX: U2.83
UART5_TX: U2.80
USART1_RX: R58.1 U2.69 | length 34.9
  Top Layer w0.2: U2.69@95.282,64.595 105.966,64.595 106.934,63.627 113.919,63.627 v1(117.856,59.69)
  Bottom Layer w0.2: v1(117.856,59.69) 117.919,59.69 118.173,59.436 125.955,59.436 127.414,57.977 R58.1@127.464,57.977
USART1_TX: R56.1 R57.1 U2.68 | length 32.7
  Top Layer w0.2: U2.68@95.282,64.095 105.824,64.095 106.854,63.065 113.084,63.065 v1(116.713,59.436)
  Bottom Layer w0.2: v1(116.713,59.436) 117.331,58.818 122.546,58.818 123.387,57.977 R57.1@125.451,57.977
USART2_RX: R63.1 U2.26 | length 67.2
  Top Layer w0.2: U2.26@81.757,54.07 81.757,52.995 83.113,51.639 83.362,51.639 v1(83.439,51.562) ; v1(93.218,47.879) 126.619,47.879 131.191,43.307 131.191,32.737 R63.1@129.699,31.245
  Bottom Layer w0.2: v1(83.439,51.562) 83.458,51.581 89.542,51.581 93.218,47.905 v1(93.218,47.879)
USART2_TX: R60.1 R61.1 U2.25 | length 72.1
  Top Layer w0.2: U2.25@80.232,55.595 80.232,53.844 83.168,50.908 84.436,50.908 v1(84.455,50.927) ; v1(91.64,48.46) 91.713,48.533 126.727,48.533 131.713,43.547 R61.1@131.713,31.245 R60.1@133.726,31.245
  Bottom Layer w0.2: v1(84.455,50.927) 89.553,50.927 90.558,49.922 90.558,49.542 v1(91.64,48.46)
VCC_5.2V: R27.1 U6.4 | length 6
  Bottom Layer w1: U6.4@107.696,75.224 R27.1@107.696,81.215
VDDA: C6.1 FB1.2 U2.21 U2.22 | length 10
  Top Layer w0.2: U2.22@80.232,57.095 81.987,57.095 82.106,57.214 82.106,57.595 ; U2.21@80.232,57.595 82.106,57.595 ; v1(83.17,58.689) 83.17,58.659 82.106,57.595
  Bottom Layer w0.2: v1(83.17,58.689) 84.787,58.689 C6.1@85.025,58.928 ; C6.1@85.025,58.878 85.025,57.99 85.209,57.807 85.209,57.169 FB1.2@85.609,56.769
VIN: P5.2 S2.1 | length 12.1
  Top Layer w2: S2.1@22.733,101.182 22.733,101.317 25.146,103.73 P5.2@25.146,112.268
VIN2: Q9.5 Q9.6 Q9.7 Q9.8 R66.2 R89.2 S2.2 | length 47.2
  Top Layer w0.3: R89.2@14.478,110.806 14.528,110.806 17.895,114.173 20.5,114.173 22.098,112.575 22.098,103.505 21.079,102.486 21.079,92.586 S2.2@22.733,90.932
  Top Layer w2: S2.2@22.733,90.932 27.368,90.932 Q9.8@27.813,91.377 ; Q9.8@27.813,91.694 31.306,91.694 Q9.5@31.623,91.377
  Bottom Layer w1: R66.2@18.034,93.068 18.884,93.068 20.733,91.219 22.446,91.219 S2.2@22.733,90.932
VREF: C73.1 R71.1 R72.1 R73.1 R77.1 R78.1 R81.1 R83.1 U16.4 U16.10 | length 62.1
  Top Layer w0.2: v1(23.938,73.635) 23.963,73.66 26.289,73.66 ; R73.1@25.731,68.264 25.431,68.564 25.431,68.614 25.146,68.899 25.146,70.739 26.289,71.882 26.289,73.66 ; R73.1@25.781,68.264 25.094,68.264 24.765,67.935 24.765,61.94 25.256,61.449 26.143,61.449 v1(26.162,61.468) ; R73.1@25.831,68.256 26.851,69.275 27.084,69.275 v1(27.16,69.352) 27.237,69.428 27.642,69.428 28.195,69.981 U16.10@29.188,69.981 ; U16.4@31.246,72.531 31.24,72.537 31.24,73.489 30.561,74.168 26.787,74.168 26.67,74.051 26.67,74.041 26.289,73.66 ; v1(37.903,64.262) 37.903,66.571 39.104,67.772 40.987,67.772 41.733,68.518 R78.1@41.783,68.518 ; R78.1@41.833,68.518 42.487,67.864 44.462,67.864 44.779,68.182 44.779,68.2 45.097,68.518 R81.1@45.847,68.518 46.597,68.518 46.933,68.182 46.933,68.179 47.294,67.818 49.123,67.818 49.823,68.518 R77.1@49.872,68.518
  Bottom Layer w0.2: R83.1@21.398,74.778 21.398,74.728 22.491,73.635 v1(23.938,73.635) ; C73.1@25.973,68.199 25.973,68.249 26.999,69.275 27.084,69.275 v1(27.16,69.352) ; v1(26.162,61.468) 31.257,61.468 32.589,62.8 32.689,62.8 33.443,62.046 35.518,62.046 36.653,63.181 R71.1@36.703,63.181 36.753,63.181 37.834,64.262 v1(37.903,64.262)
pads on no net: BT1. J1.1 J1.4 J1.6 J1.7 J1.8 J1.9 SW2.1 SW2.4 U1.3 U1.4 U1.5 U1.8 U1.16 U1.17 U1.20 U1.21 U1.22 U1.23 U2.6 U2.12 U2.13 U2.18 U2.24 U2.37 U2.38 U2.39 U2.40 U2.41 U2.42 U2.43 U2.44 U2.73 U2.81 U2.82 U2.84 U2.85 U2.87 U2.88 U2.98 U3.2 U3.3 U3.5 U3.6 U3.7 U3.8 U3.9 U3.10 U3.15 U3.16 U3.18 U3.22 U3.24 U3.25 U3.26 U3.27 U3.30 U3.31 U3.32 U3.33 U3.34 U3.35 U3.36 U3.37 U3.39 U3.40 U3.41 U3.42 U3.43 U4.1 U4.4 U7.3 U7.5 U9.16 U9.18 U10.3 U10.5 U13.1 U13.20 U15.7 U15.8 U15.9 U15.10 U18.5 U19.5

## Polygon pours and split planes (outlines as drawn)
ISO_DI_GND on Bottom Layer "ISO_DI_GND_L02_P000" (solid, remove dead copper, pour order 0): 108.712,110.236 112.903,106.045 112.903,105.664 112.903,96.52 109.982,93.599 98.425,93.599 95.885,91.059 84.836,91.059 84.836,86.614 58.42,86.614 52.959,81.153 38.862,81.153 38.862,90.678 34.925,94.615 28.448,94.615 27.94,95.123 27.94,108.458 29.718,110.236 35.433,110.236
GND on Bottom Layer "GND_L02_P008" (solid, remove dead copper, pour order 8): 181.229,2.286 181.229,8.636 183.134,10.541 187.96,10.541 187.96,60.833 188.087,60.96 181.737,67.31 137.541,67.31 132.461,62.23 132.461,61.595 128.016,61.595 126.365,63.246 126.365,71.12 124.968,72.517 107.569,72.517 105.283,74.803 105.156,74.803 105.156,87.884 105.283,88.011 104.902,88.392 104.902,92.71 98.806,92.71 95.758,89.662 85.852,89.662 85.852,86.614 85.979,86.487 84.836,85.344 60.198,85.344 54.102,79.248 39.116,79.248 38.1,80.264 38.1,90.551 35.306,93.345 28.829,93.345 27.432,94.742 27.432,113.284 26.543,114.173 10.795,114.173 9.652,113.03 9.652,108.204 2.54,101.092 2.54,28.194 7.62,23.114 101.219,23.114 103.251,25.146 103.251,38.354 113.157,38.354 115.57,40.767 115.57,44.069 113.538,46.101 117.094,49.657 129.032,49.657 134.112,44.577 134.112,34.163 130.683,34.163 127.381,30.861 127.381,18.542 127.508,18.415 124.46,15.367 124.46,6.35 123.952,5.842 127.508,2.286
RS485_EXT_GND on Bottom Layer "RS485_EXT_GND_L02_P005" (solid, remove dead copper, pour order 5): 115.824,39.497 113.792,37.465 107.823,37.592 106.807,36.576 106.807,10.414 111.633,5.588 111.633,2.54 121.412,2.54 123.317,4.445 123.317,15.875 125.73,18.288 125.73,28.067 126.746,29.083 126.746,34.036 127.254,34.544 130.937,34.544 133.223,36.83 133.223,41.021 117.348,41.021
ISO_DAC_GND on Bottom Layer "ISO_DAC_GND_L02_P002" (solid, remove dead copper, pour order 2): 130.048,73.152 130.048,73.66 131.826,75.438 131.826,83.947 137.541,89.662 152.527,89.662 155.067,92.202 172.466,92.202 173.482,93.218 176.657,93.218 180.594,97.155 187.325,97.155 189.484,94.996 189.484,72.39 186.055,68.961 141.351,68.961 140.97,68.58 138.557,68.58 131.953,61.976 131.953,59.436 130.937,58.42 127.889,58.42 126.873,59.436 126.873,70.358 127.889,71.374
ADC_IN_GND_A1 on Bottom Layer "ADC_IN_GND_A1_L02_P001" (solid, remove dead copper, pour order 1): 114.173,109.728 114.173,111.252 116.713,113.792 177.292,113.792 180.848,110.236 180.848,98.806 176.022,93.98 173.228,93.98 171.958,92.71 153.924,92.71 151.384,90.17 137.16,90.17 130.683,83.693 130.683,74.93 129.032,73.279 107.823,73.279 106.045,75.057 106.045,91.694 107.569,93.218 110.49,93.218 113.919,96.647 113.919,109.093
ISO_DI_GND on Top Layer "ISO_DI_GND_L01_P007" (solid, remove dead copper, pour order 7): 35.433,110.236 29.718,110.236 27.94,108.458 27.94,95.123 28.448,94.615 34.925,94.615 38.862,90.678 38.862,81.153 52.959,81.153 58.42,86.614 84.836,86.614 84.836,91.059 95.885,91.059 98.425,93.599 109.982,93.599 112.903,96.52 112.903,110.236
ISO_DAC_GND on Top Layer "ISO_DAC_GND_L01_P003" (solid, remove dead copper, pour order 3): 130.048,73.152 130.048,73.66 131.826,75.438 131.826,83.947 137.541,89.662 152.527,89.662 155.067,92.202 172.466,92.202 173.482,93.218 176.657,93.218 180.594,97.155 187.325,97.155 189.484,94.996 189.484,72.39 186.055,68.961 141.351,68.961 140.97,68.58 138.557,68.58 131.953,61.976 131.953,59.436 130.937,58.42 127.889,58.42 126.873,59.436 126.873,70.358 127.889,71.374
GND on Top Layer "GND_L01_P009" (solid, remove dead copper, pour order 9): 181.356,2.286 181.483,2.413 181.483,7.747 184.277,10.541 187.96,10.541 187.96,60.833 188.087,60.96 181.737,67.31 137.541,67.31 132.461,62.23 132.461,61.595 128.016,61.595 126.365,63.246 126.365,71.12 124.968,72.517 107.569,72.517 105.283,74.803 105.156,74.803 105.156,87.884 105.283,88.011 104.902,88.392 104.902,92.71 98.806,92.71 95.758,89.662 85.852,89.662 85.852,86.614 85.979,86.487 84.836,85.344 60.198,85.344 54.102,79.248 39.116,79.248 38.1,80.264 38.1,90.551 35.306,93.345 28.829,93.345 27.432,94.742 27.432,113.284 26.416,114.3 10.922,114.3 9.652,113.03 9.652,108.204 2.54,101.092 2.54,28.194 7.62,23.114 101.219,23.114 103.251,25.146 103.251,38.354 113.157,38.354 115.57,40.767 115.57,44.069 113.538,46.101 117.094,49.657 129.032,49.657 134.112,44.577 134.112,34.163 130.683,34.163 127.381,30.861 127.381,18.542 127.508,18.415 124.46,15.367 124.46,6.35 123.952,5.842 127.508,2.286
ADC_IN_GND_A1 on Top Layer "ADC_IN_GND_A1_L01_P006" (solid, remove dead copper, pour order 6): 114.173,109.728 114.173,111.252 116.713,113.792 177.292,113.792 180.848,110.236 180.848,98.806 176.022,93.98 173.228,93.98 171.958,92.71 153.924,92.71 151.384,90.17 137.16,90.17 130.683,83.693 130.683,74.93 129.032,73.279 107.823,73.279 106.045,75.057 106.045,91.694 107.569,93.218 110.49,93.218 113.919,96.647 113.919,109.093
RS485_EXT_GND on Top Layer "RS485_EXT_GND_L01_P004" (solid, remove dead copper, pour order 4): 115.824,39.878 115.824,37.719 114.117,36.012 107.402,36.155 106.807,35.56 106.807,11.43 111.633,6.604 111.633,2.54 121.412,2.54 123.317,4.445 123.317,15.875 125.73,18.288 125.73,28.067 127.254,29.591 127.254,33.02 128.778,34.544 132.715,34.544 132.715,39.243 130.937,41.021 116.967,41.021

## Keep-outs
Keep-Out Layer:
  the board outline again, w0.254

## Other copper
Top Layer:
  region net NetC63_2: 22.86,78.613 31.75,78.613 31.75,76.835 31.623,76.708 31.496,76.835 22.86,76.835
  region net NetC62_2: 27.813,87.503 30.353,87.503 30.607,87.249 30.607,86.106 32.131,84.582 32.131,81.661 32.004,81.534 28.956,81.534 28.829,81.661 28.829,84.963 27.813,85.979
  region net NetC5_2: 14.478,83.185 14.696,83.403 24.928,83.403 25.273,83.058 25.273,81.661 19.558,81.661 19.094,81.197 14.815,81.197 14.478,81.534

## Silkscreen, mask and mechanical layers (free items; w line width, h text height)
Top Overlay:
  text "模拟输入" at 179.001,114.684 h2
  text "电源" at 9.5,114.651 h2
  text "光耦输入" at 102.5,114.178 h2
  text "GND" at 18.5,109.018 h1.52
  text "26V" at 24,109.018 h1.52
  text "E" at 29,109 h1.52
  text "电池" at 4,104.123 h2
  text "B+" at 8,99.5 h1.52
  text "SR" at 7.997,97.518 h1.52
  text "GND" at 7.5,95.018 h1.52
  text "G" at 182,93.524 h2
  text "V+" at 182,90 h2
  text "3V3" at 87.512,86 h1 r270
  text "GND" at 89.512,86 h1 r270
  text "DIO" at 92.012,86 h1 r270
  text "CLK" at 94.512,86 h1 r270
  text "G" at 182,85.024 h2
  text "Vo" at 182,81.524 h2
  text "G" at 182,76.024 h2
  text "Io" at 182,72.024 h2
  text "FULL" at 51.529,69.523 h1.8 r270
  text "CHG" at 53.18,69.269 h1.8 r270
  text "模拟输出" at 183.001,68.684 h2
  text "PG" at 54.831,68.634 h1.8 r270
  text "3.3V" at 75.003,65.88 h1.8
  text "QY-PLC" at 99.314,62.836 h1.5
  text "5V" at 58.62,62.705 h1.8
  text "20200726" at 99.314,59.708 h1.5
  text "LINKA" at 186.001,59.128 h1.2
  text "LINKB" at 185.874,54.556 h1.2
  text "WORK" at 186.001,49.49 h1.2
  text "NET" at 186.001,44.904 h1.2
  text "26V" at 7,44.524 h2
  text "GND" at 7,40.524 h2
  text "24V输出" at 3.5,37.178 h2
  text "12V" at 7,32.5 h2
  text "GND" at 7,28.024 h2
  text "12V输出" at 3,23.678 h2
  text "12V" at 146.5,19.5 h2 r270
  text "GND" at 149.024,19.5 h2 r270
  text "24V" at 151.5,19.5 h2 r270
  text "232" at 153.5,15.024 h2
  text "继电器输出" at 6.501,1.178 h2
  text "485" at 107.061,1.04 h2
Bottom Paste:
  rectangle: 29.337,68.707 33.655,72.39
Bottom Solder:
  rectangle: 29.337,68.707 33.655,72.39

## Text inside footprints (layer, text, board x,y; h text height)
J1: Top Overlay "5" at 148.326,5.849 h1.27; Top Overlay "9" at 147.873,8.645 h1.27 r5; Top Overlay "6" at 130.729,8.579 h1.27 r5; Top Overlay "1" at 130.493,5.768 h1.27
SU1: Top Overlay "+" at 116.381,60.794 h1 r225
U1: Top Overlay "1" at 140.462,63.627 h1.27 r180; Top Overlay "12" at 141.859,35.814 h1.27 r180; Top Overlay "13" at 175.894,35.433 h1.27 r180; Top Overlay "23" at 175.895,61.214 h1.27 r180
U3: Mechanical 6 "Polygon Pour cutout" at 177.546,-7.166 h1.02 r180